# Altium PCB voting machine.PcbDoc
Units mil, origin at the board's own origin, x right, y up, seen from the top; angles counter-clockwise.
Board outline 2645.7 x 2252 mil, 4 copper layers (Top Layer, Layer 1, Layer 2, Bottom Layer), stack 23.756 mil thick; 23 components, 29 nets, 122 pads, 25 vias.
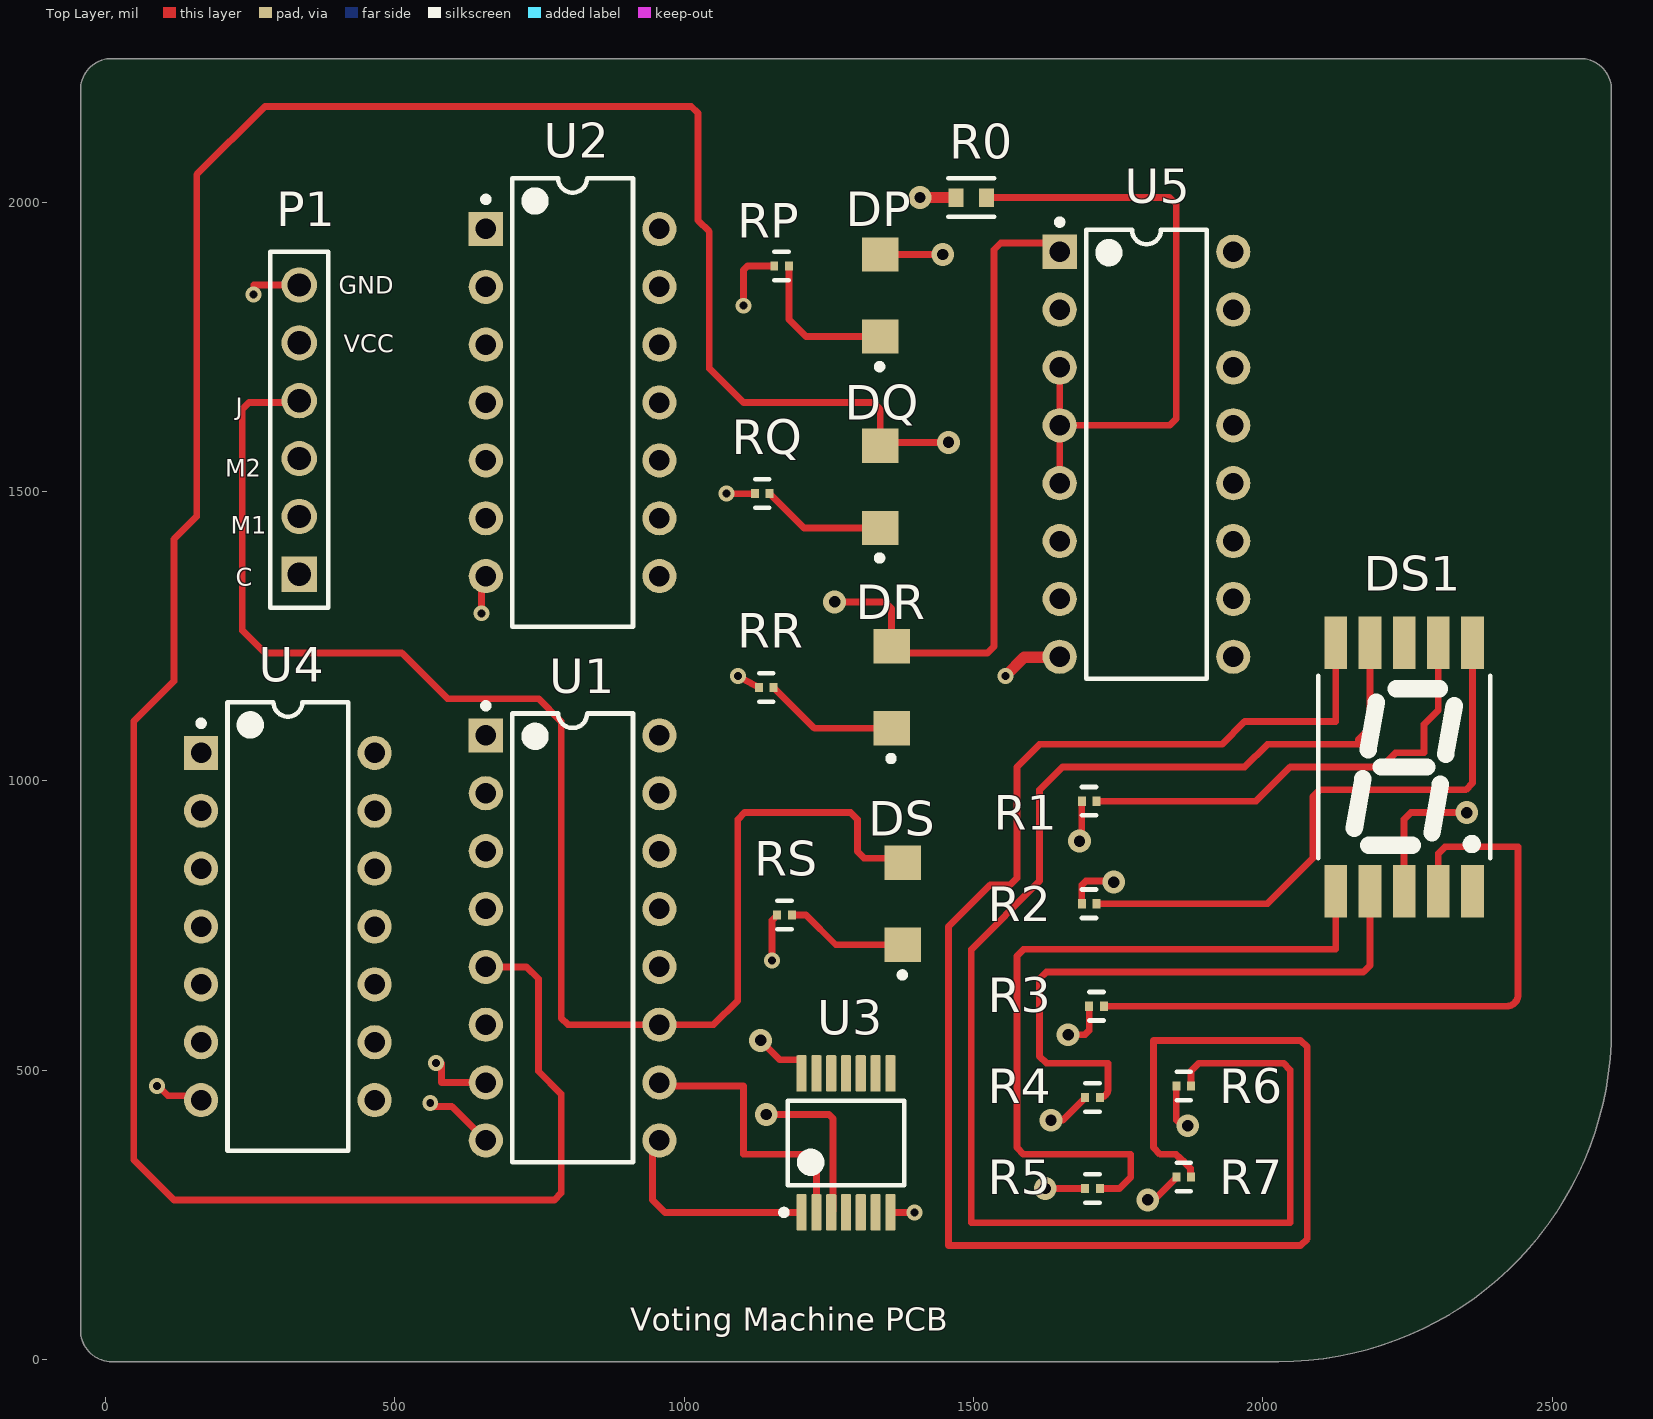
[diagram p0: Top Layer view]
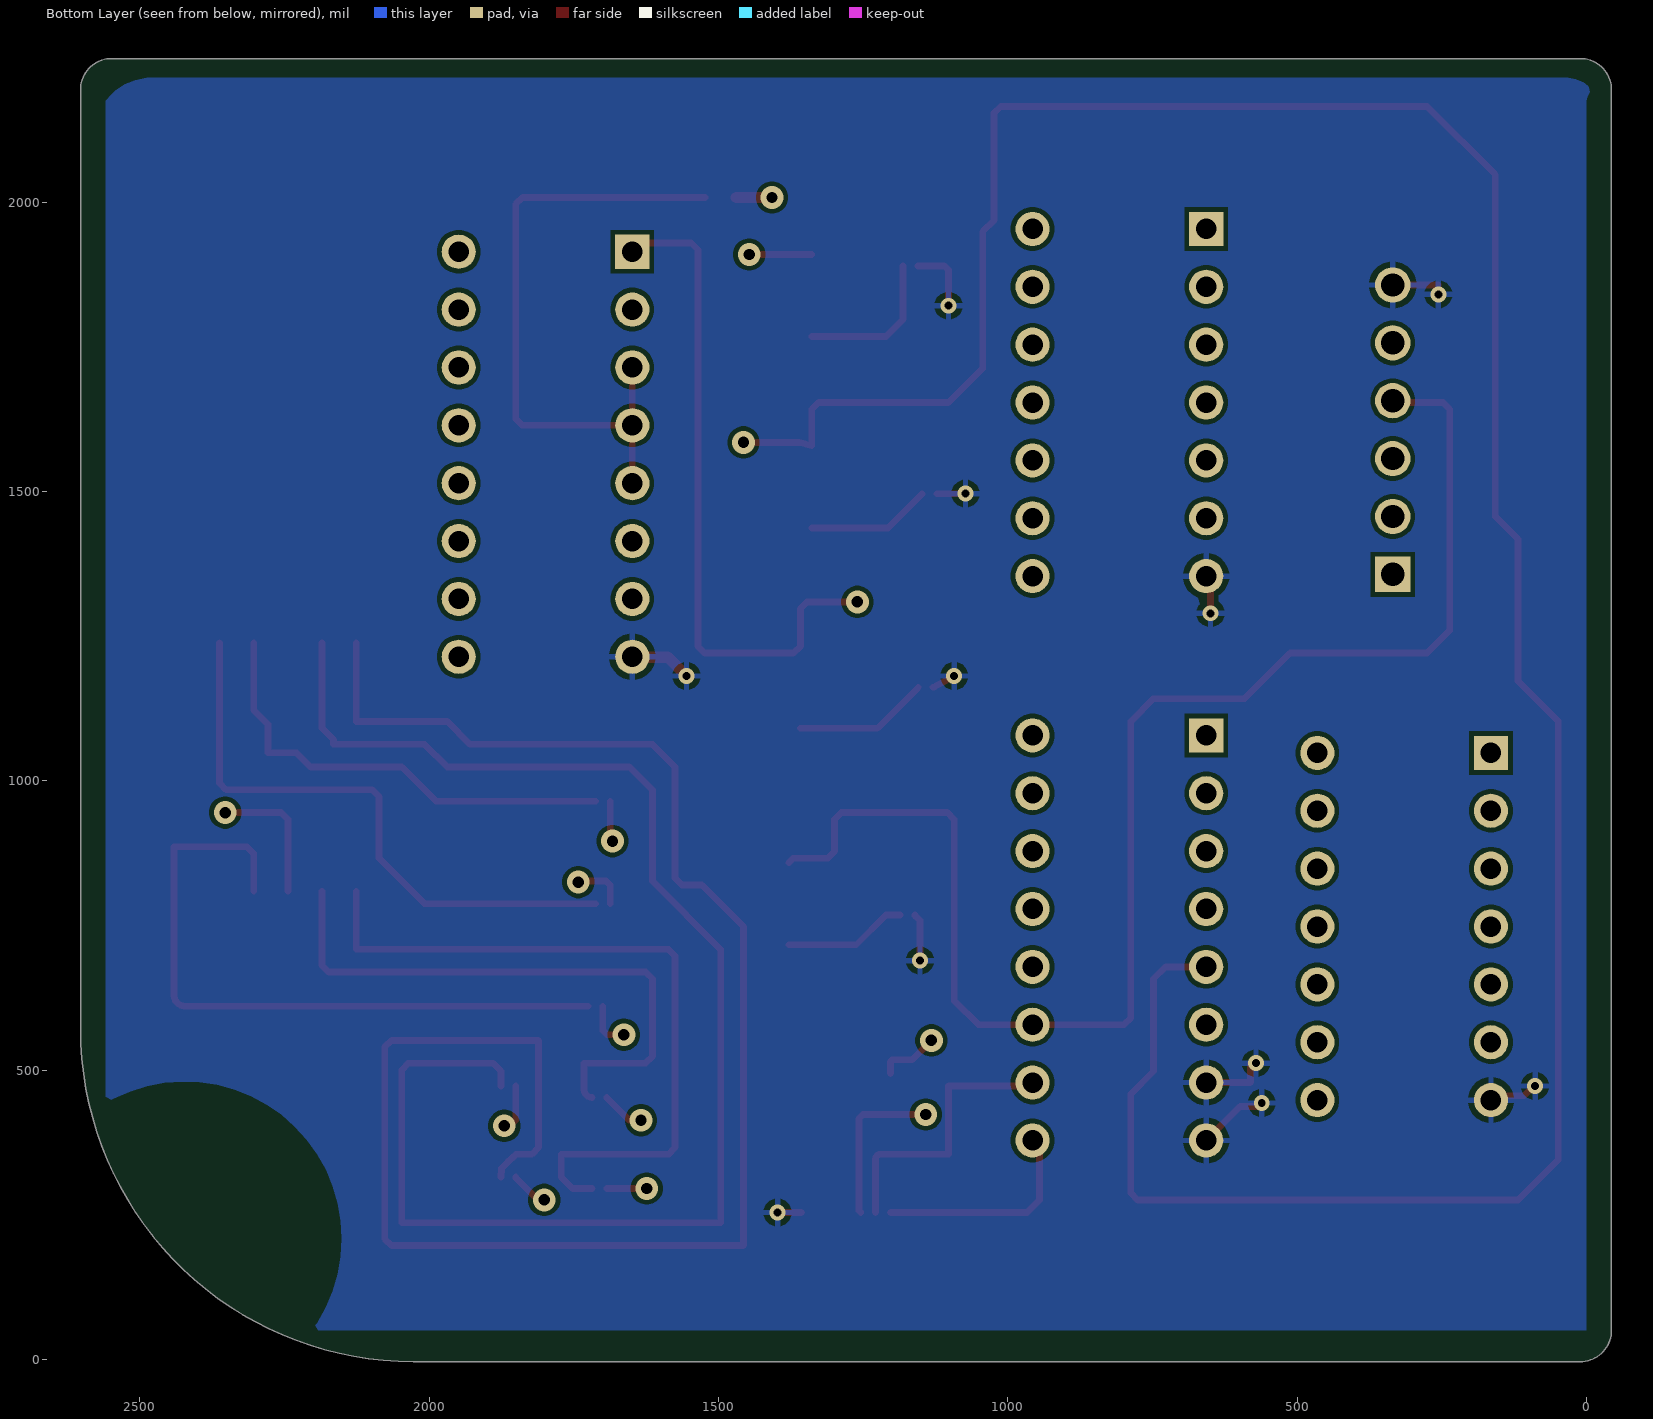
[diagram p1: Bottom Layer view, seen from below]
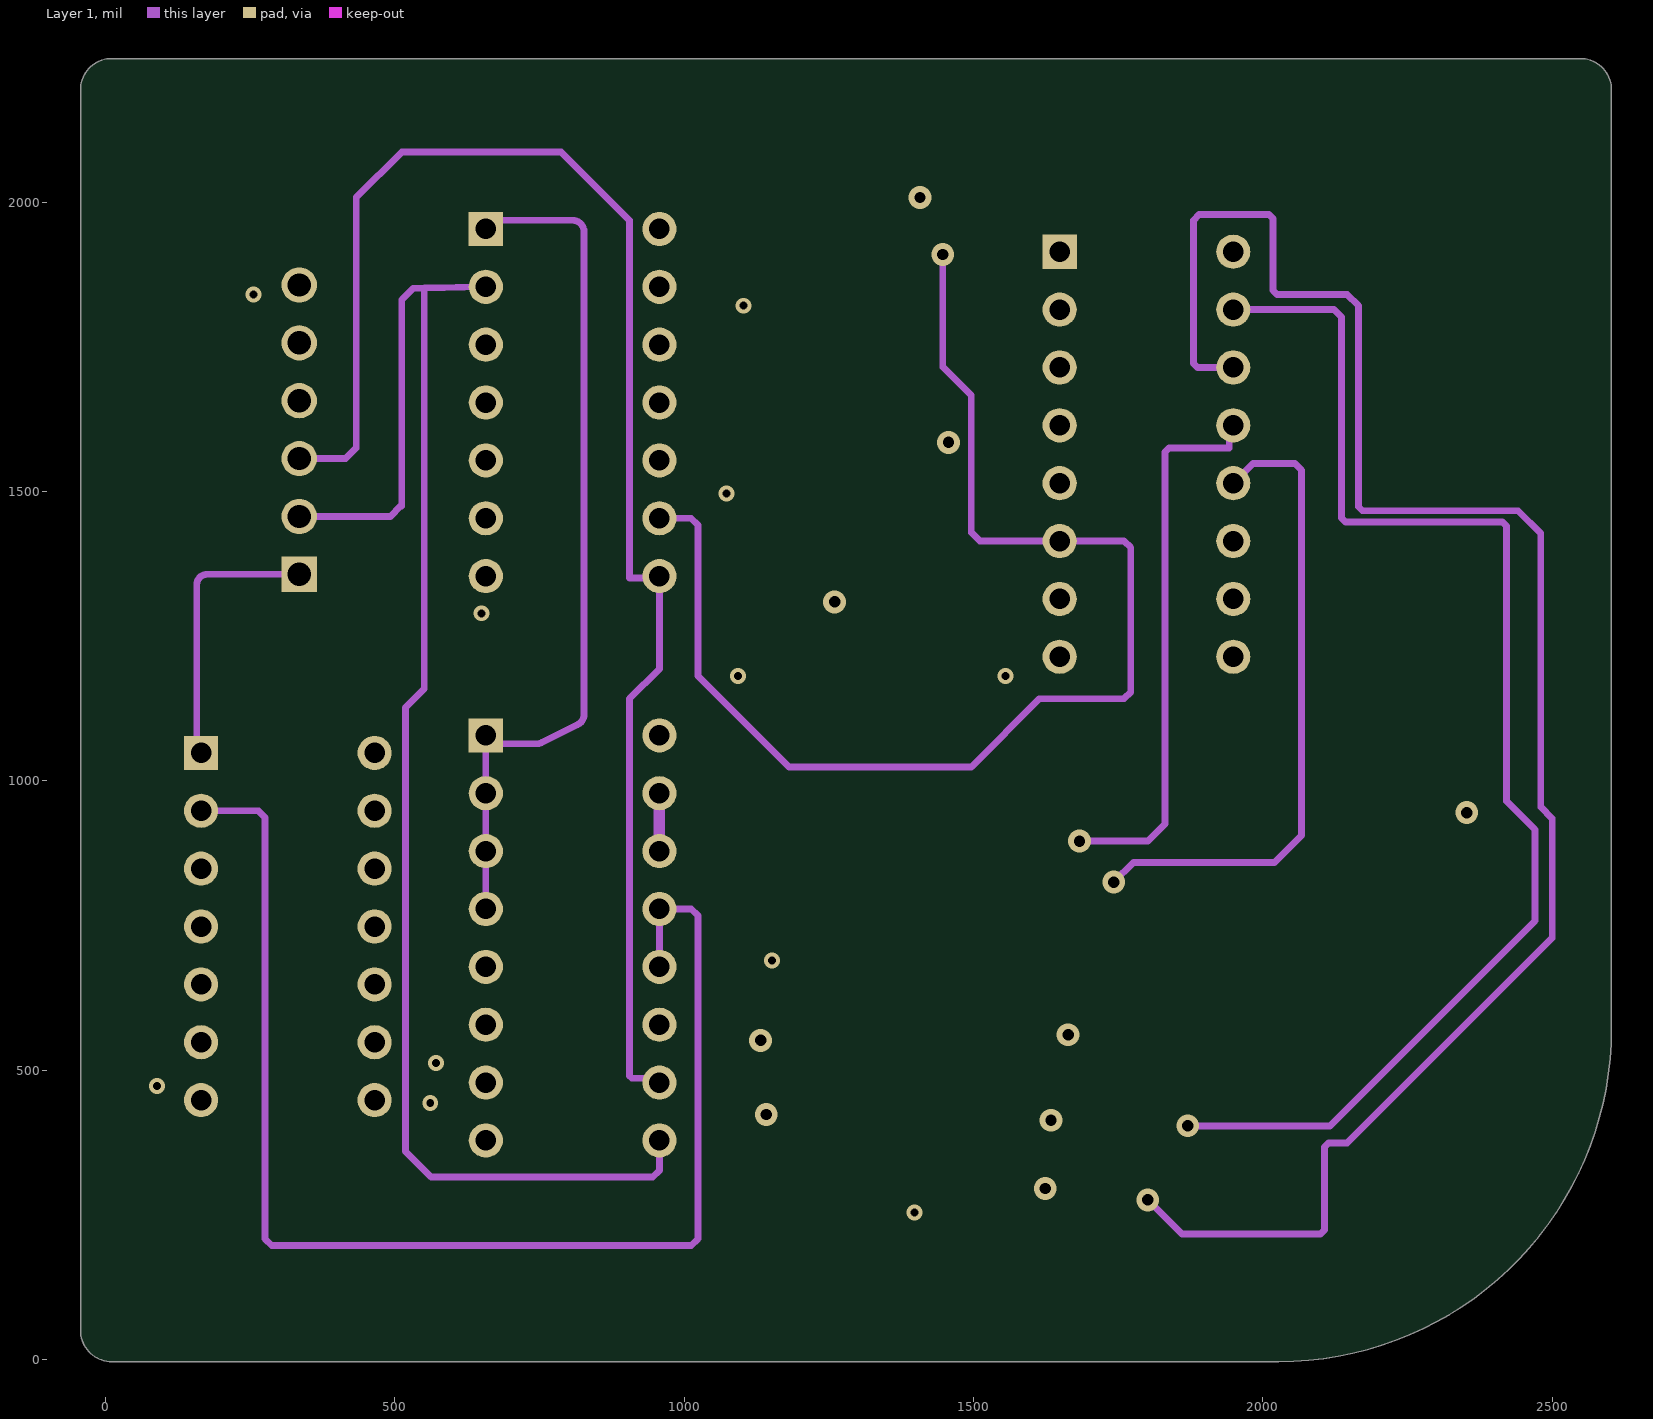
[diagram p2: Layer 1]
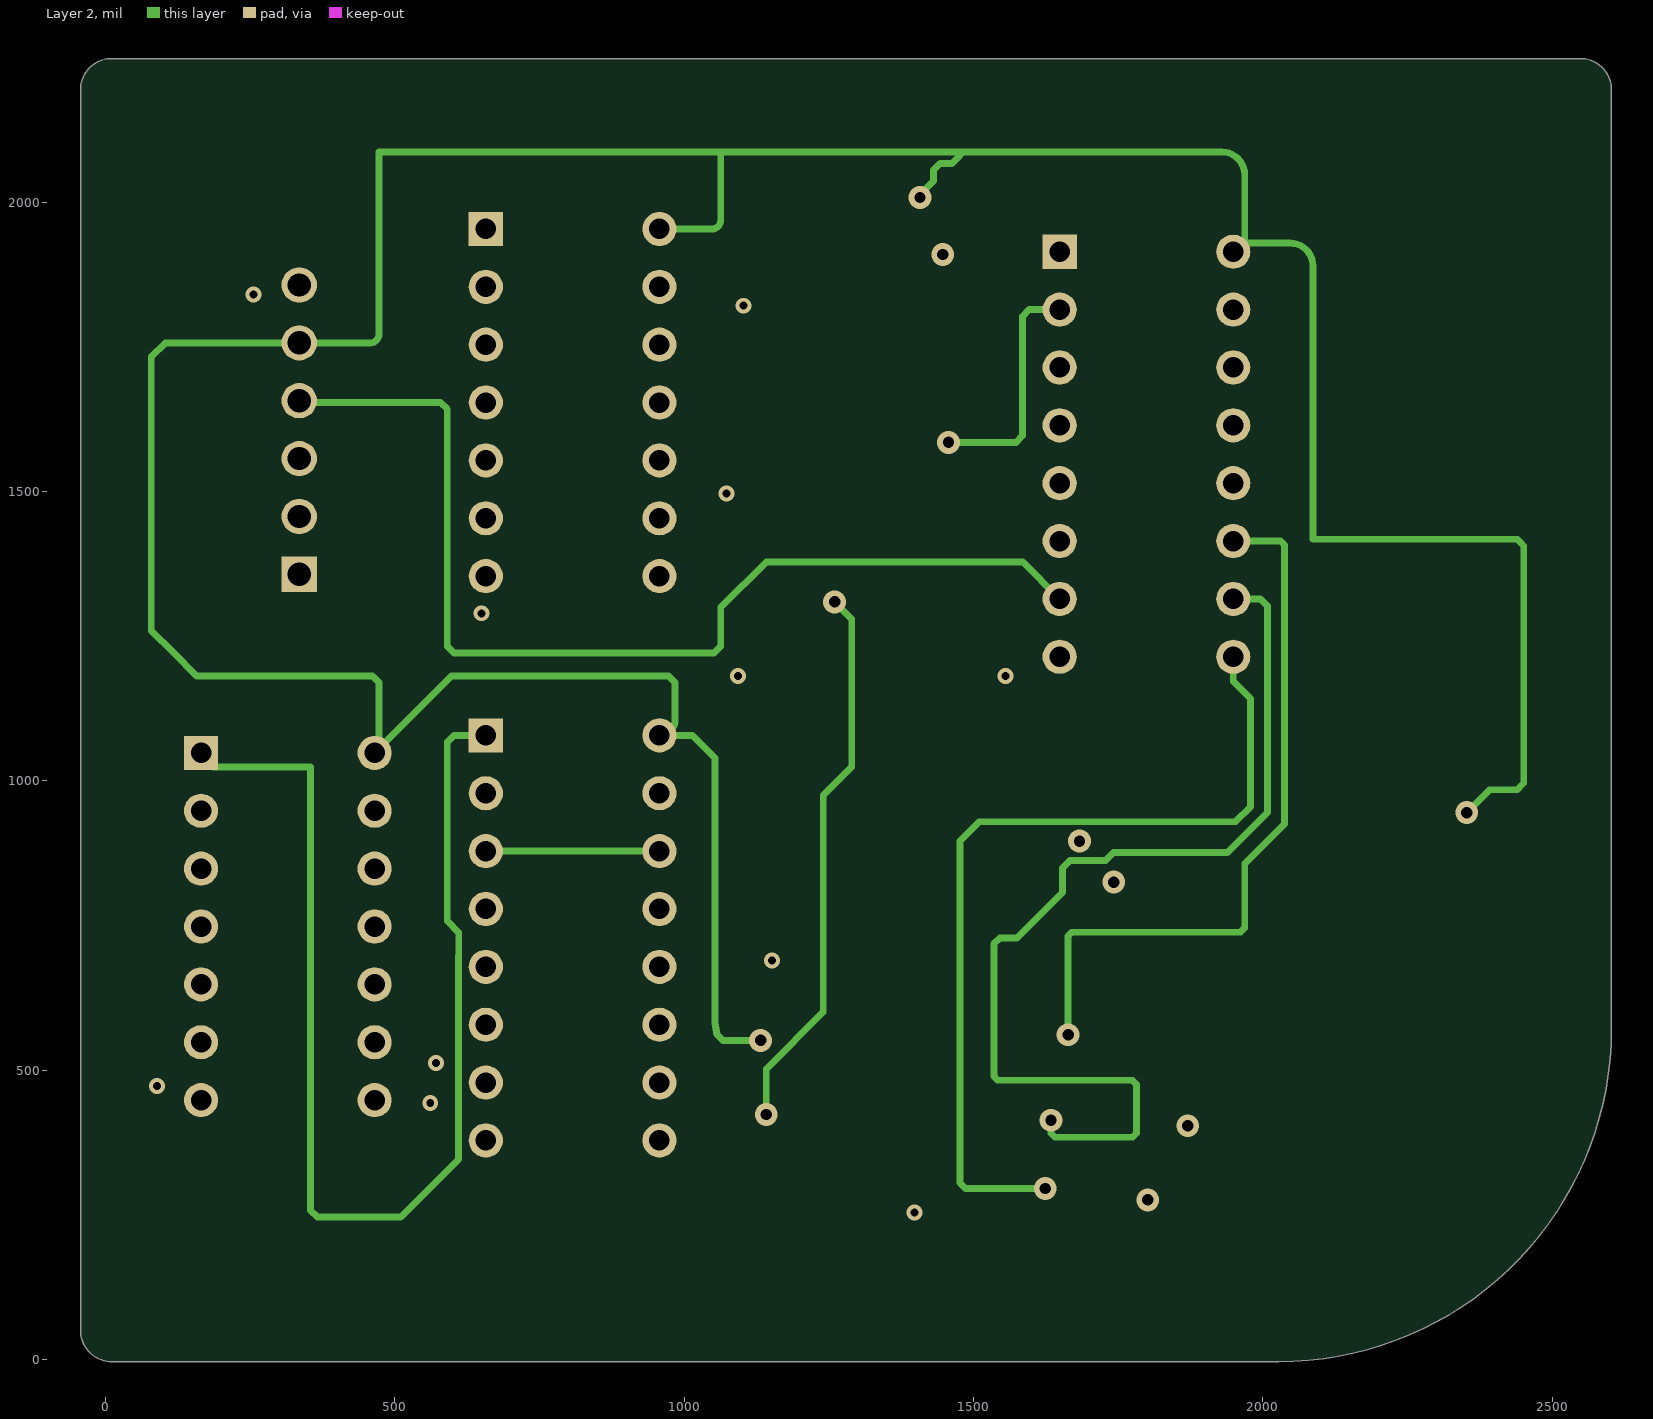
[diagram p3: Layer 2]
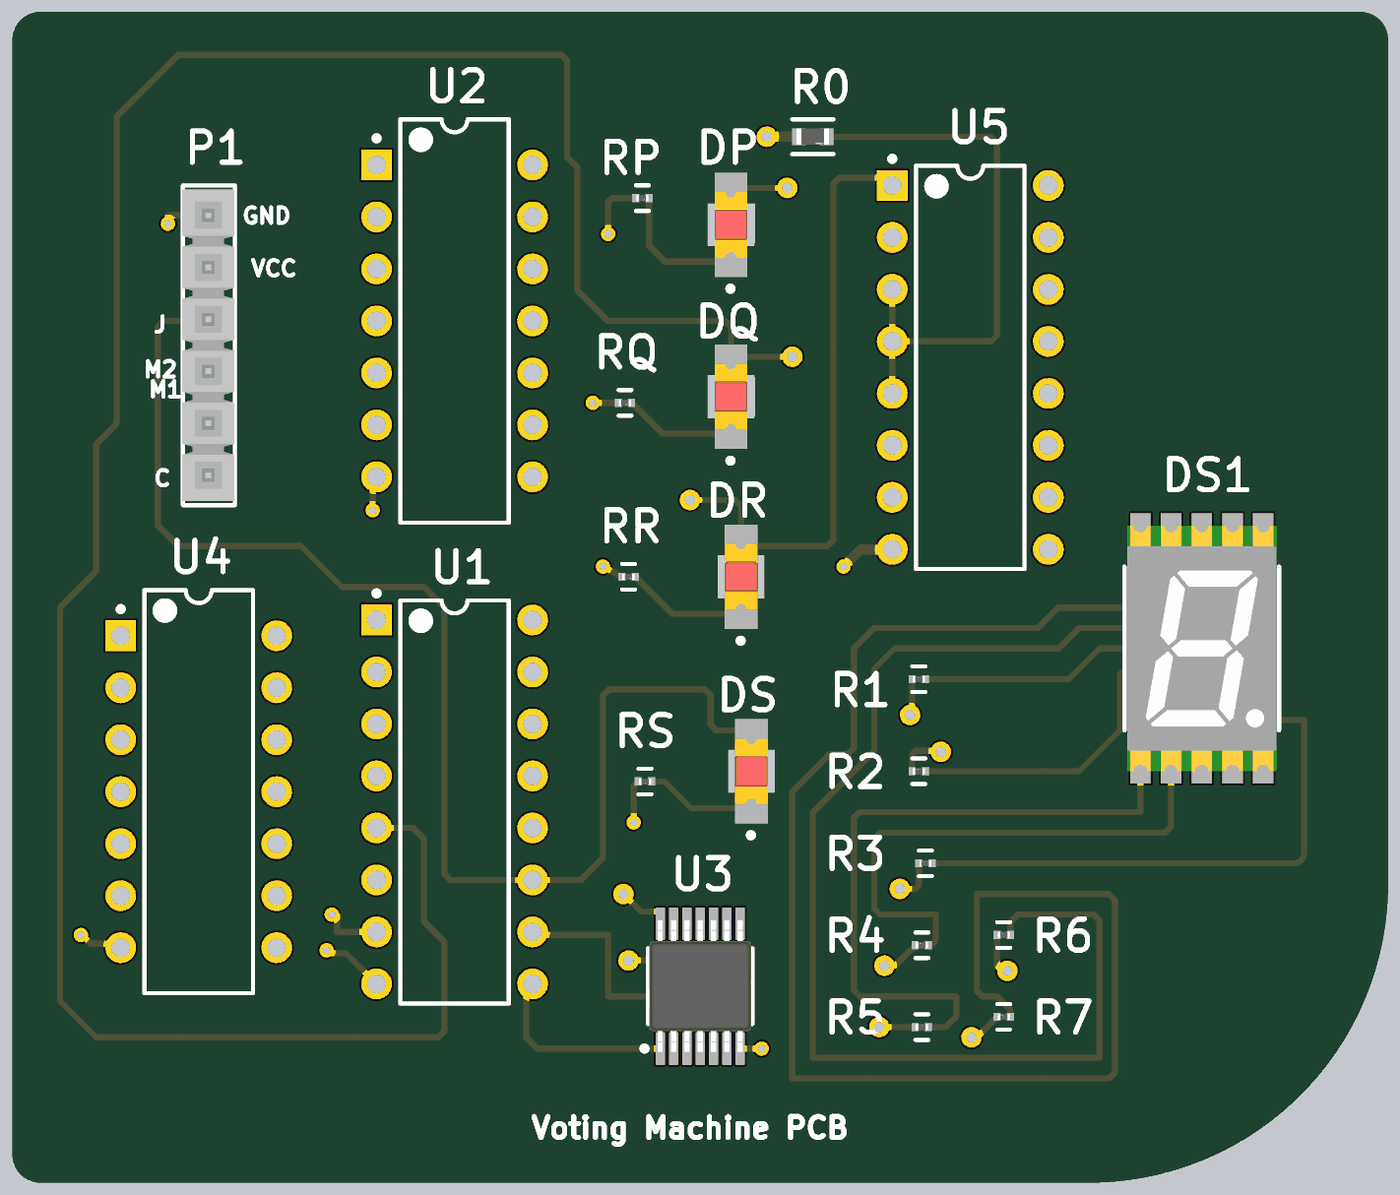
[diagram p4: 3D render of the assembled board from above, using the file's embedded part models]

## Layer stack, top to bottom
Top Solder: solder mask 0.4, Solder Resist, Dk 3.5
Top Layer: signal copper 1.4
Dielectric 2: prepreg 2.8, PP-006, Dk 4.1
Layer 1: signal copper 1.378
Dielectric 1: dielectric 12.6, FR-4, Dk 4.8
Layer 2: signal copper 1.378
Dielectric 3: prepreg 2.8, PP-006, Dk 4.1
Bottom Layer: signal copper 1.4
Bottom Solder: solder mask 0.4, Solder Resist, Dk 3.5

## Board outline
-43.32,50 -43.32,2194.09 cw(c10.63,2194.09) 10.63,2248.05 2548.43,2248.05 cw(c2548.43,2194.09) 2602.38,2194.09 2602.38,570.87 cw(c2027.56,570.87) 2027.56,-3.95 10.63,-3.95 cw(c10.63,50)

## Design rules (kind name [scope] priority, off if disabled: settings)
Clearance 5V_Clearance [All] p1: gap=7.87 ignorepadtopadclearanceinfootprint=FALSE
Clearance Clearance_1 [All] p2: gap=9.84 ignorepadtopadclearanceinfootprint=FALSE
PolygonConnect [All] p1: connectstyle=Relief reliefconductorwidth=10 reliefentries=4 polygonreliefangle="90 Angle" airgapwidth=10
RoutingVias RoutingVias_1A [All] p1: holewidth=19.68 width=39.37 viastyle="Through Hole" minholewidth=9.84 minwidth=19.68 maxholewidth=59.06 maxwidth=78.74
RoutingVias RoutingVias_1 [All] p2: holewidth=28 width=50 viastyle="Through Hole" minholewidth=28 minwidth=50 maxholewidth=28 maxwidth=50
SolderMaskExpansion [All] p1: expansion=4 istentingtop=FALSE
SupplyNets "Schematic Supply Nets_1" [InNet('GND')] p1: voltage=0.000
SupplyNets "Schematic Supply Nets" [InNet('+5')] p2: voltage=0.000
Width Width_1A [All] p1: maxlimit=39.37 minlimit=9.84 preferedwidth=19.68
Width Width_1 [All] p2: maxlimit=10 minlimit=10 preferedwidth=10
30 further rules are at their usual default settings.

## Components (designator, comment, footprint, x,y, rotation, side; value= is the part's Value field where it differs from the comment)
DP "LTST-C230EKT" FP-LTST-C230EKT-MFG 1338.58,1838.58 r90 top
DQ "LTST-C230EKT" FP-LTST-C230EKT-MFG 1338.58,1507.87 r90 top
DR "LTST-C230EKT" FP-LTST-C230EKT-MFG 1358.27,1161.42 r90 top
DS "LTST-C230EKT" FP-LTST-C230EKT-MFG 1377.95,787.4 r90 top
DS1 "157112S12800" WL-S7DS_L12W7.3H3.75 2244.09,1023.62 r0 top
P1 "TSW-106-07-F-S" SMTC-TSW-106-07-X-S 334.65,1356.69 r90 top
R0 "AC0603FR-101KL" FP-AC0603-IPC_C 1496.06,2007.87 r0 top
R1 "AF0201FR-07330RL" FP-AF0201-MFG 1699.8,964.57 r180 top
R2 "AF0201FR-07330RL" FP-AF0201-MFG 1699.8,787.4 r180 top
R3 "AF0201FR-07330RL" FP-AF0201-MFG 1712.6,610.24 r180 top
R4 "AF0201FR-07330RL" FP-AF0201-MFG 1705.71,452.76 r180 top
R5 "AF0201FR-07330RL" FP-AF0201-MFG 1705.71,295.28 r180 top
R6 "AF0201FR-07330RL" FP-AF0201-MFG 1863.19,472.44 r180 top
R7 "AF0201FR-07330RL" FP-AF0201-MFG 1863.19,314.96 r180 top
RP "AF0201FR-07330RL" FP-AF0201-MFG 1168.31,1889.76 r0 top
RQ "AF0201FR-07330RL" FP-AF0201-MFG 1134.84,1496.06 r0 top
RR "AF0201FR-07330RL" FP-AF0201-MFG 1141.73,1161.42 r0 top
RS "AF0201FR-07330RL" FP-AF0201-MFG 1173.23,767.72 r0 top
U1 "SN74F151BN" N0016A 807.09,728.35 r0 top
U2 "CD4073BE" N0014A 807.09,1653.54 r0 top
U3 "CD4030BPWR" PW0014A_M 1279.53,374.02 r90 top
U4 "SN7404N" N0014A 314.96,748.03 r0 top
U5 "SN7447ANE4" TI-N16 1798.82,1564.17 r0 top

## Footprints (in the part's own frame and the unit in brackets; to place one, negate y for a bottom-side part, rotate by r counter-clockwise, add the part's x,y. Pads: shape width x height; smd on the part's side, far side on the other; paste and mask are expansions set on the pad)
FP-AC0603-IPC_C [mil]
  rect 25.93x31.97 smd paste+0 mask+0: 1(-26.64,0) 2(26.64,0)
  silkscreen extent -40,-33 40,33, body extent -44,-22 44,22, height 10
FP-AF0201-MFG [mm]
  rect 0.35x0.4 smd paste+0 mask+0: 1(-0.325,0) 2(0.325,0)
  silkscreen extent -0.32,-0.63 0.32,0.63, body extent -0.6,-0.3 0.6,0.3, height 0.25
FP-LTST-C230EKT-MFG [mm]
  rect 1.5x1.6 smd paste+0 mask+0: 1(-1.8,0) 2(1.8,0)
  silkscreen extent -3.25,-0.1 -3,0.15, body extent -2.65,-0.95 2.65,0.95, height 0.25
N0014A [mm] "DIP, 14-Leads, Body 19.7x6.6mm, Pitch 2.54mm"
  rect 1.5x1.5 hole 0.9: 1(-3.81,7.62)
  round 1.5 hole 0.9: 2(-3.81,5.08) 3(-3.81,2.54) 4(-3.81,0) 5(-3.81,-2.54) 6(-3.81,-5.08) 7(-3.81,-7.62) 8(3.81,-7.62) 9(3.81,-5.08) 10(3.81,-2.54) 11(3.81,0) 12(3.81,2.54) 13(3.81,5.08) 14(3.81,7.62)
  silkscreen extent -3.93,-9.85 2.65,9.85, body extent -3.95,-9.85 3.95,9.85, height 5.08
N0016A [mm] "DIP, 16-Leads, Body 19.7x6.6mm, Pitch 2.54mm"
  rect 1.5x1.5 hole 0.9: 1(-3.81,8.89)
  round 1.5 hole 0.9: 2(-3.81,6.35) 3(-3.81,3.81) 4(-3.81,1.27) 5(-3.81,-1.27) 6(-3.81,-3.81) 7(-3.81,-6.35) 8(-3.81,-8.89) 9(3.81,-8.89) 10(3.81,-6.35) 11(3.81,-3.81) 12(3.81,-1.27) 13(3.81,1.27) 14(3.81,3.81) 15(3.81,6.35) 16(3.81,8.89)
  silkscreen extent -3.93,-9.85 2.65,10.31, body extent -3.95,-9.85 3.95,9.85, height 5.08
PW0014A_M [mm] "SOP, 14-Leads, Body 5.1x4.5mm, Pitch 0.65mm, IPC Low Density"
  rrect22% 1.6x0.45 smd: 1(-3.05,1.95) 2(-3.05,1.3) 3(-3.05,0.65) 4(-3.05,0) 5(-3.05,-0.65) 6(-3.05,-1.3) 7(-3.05,-1.95) 8(3.05,-1.95) 9(3.05,-1.3) 10(3.05,-0.65) 11(3.05,0) 12(3.05,0.65) 13(3.05,1.3) 14(3.05,1.95)
  silkscreen extent -3.17,-2.55 1.85,2.85, body extent -3.21,-2.5 3.21,2.5, height 1
SMTC-TSW-106-07-X-S [mm] ".025 SQ Post Terminal Strip Assembly, 1x6 Pins, Vertical, 2.54mm Pitch, Male"
  rect 1.55x1.55 hole 1.02: 1(0,0)
  round 1.55 hole 1.02: 2(2.54,0) 3(5.08,0) 4(7.62,0) 5(10.16,0) 6(12.7,0)
  silkscreen extent -1.46,-1.27 14.16,1.27, body extent -1.27,-1.24 13.97,1.3, height 8.38
TI-N16 [mm] "DIP, 16-Leads, Body 19.305x6.35 mm, Pitch 2.54 mm"
  rect 1.5x1.5 hole 0.9: 1(-3.81,8.89)
  round 1.5 hole 0.9: 2(-3.81,6.35) 3(-3.81,3.81) 4(-3.81,1.27) 5(-3.81,-1.27) 6(-3.81,-3.81) 7(-3.81,-6.35) 8(-3.81,-8.89) 9(3.81,-8.89) 10(3.81,-6.35) 11(3.81,-3.81) 12(3.81,-1.27) 13(3.81,1.27) 14(3.81,3.81) 15(3.81,6.35) 16(3.81,8.89)
  silkscreen extent -3.93,-9.85 2.65,10.31, body extent -3.95,-9.85 3.95,9.85, height 5.08
WL-S7DS_L12W7.3H3.75 [mm] "7 Segments Display SMT Single Digit, body 12x7.3mm"
  rect 1x2.3 smd: 1(-3,-5.45) 2(-1.5,-5.45) 3(0,-5.45) 4(1.5,-5.45) 5(3,-5.45) 6(3,5.45) 7(1.5,5.45) 8(0,5.45) 9(-1.5,5.45) 10(-3,5.45)
  silkscreen extent -3.77,-4 3.77,4, body extent -3.65,-6 3.65,6, height 3.85

## Part data
DP DQ DR DS: library part CMP-22017-000030-1, "LED RED CLEAR CHIP SMD", Case Code (Imperial)=1206, Case Code (Metric)=3216, Color=Red, Forward Current=30mA, Forward Voltage=2V, Lens Color=Colorless, Max Operating Temperature=85°C, Min Operating Temperature=-55°C, Package Quantity=1, Power Dissipation=100mW, Reverse Voltage=5V, Test Current=10mA, Case/Package=1206, Depth=1.6mm, Dominant Wavelength=621nm, Height=1.1mm, Illumination Color=Red, Lead Free="Lead Free", Length=3.2mm, Lens Style=Diffused, Lens Transparency=Clear, Luminous Intensity=6mcd, Mount="Surface Mount", Number of Elements=1, Number of LEDs=1, Number of Pins=2, Packaging="Tape and Reel", Power Rating=100mW, Radiation Hardening=No, Viewing Angle=130°, Wavelength=630nm, Width=1.6mm
DS1: library part CMP-03913-119893987-3, "7-Seg Display, Comm Anode, Super Red Rohs Compliant: Yes", Forward Current=100mA, Forward Voltage=2V, Max Operating Temperature=85°C, Max Reverse Voltage (DC)=5V, Min Operating Temperature=-35°C, Dominant Wavelength=635nm, Height=3.75mm, Length=12mm, Luminous Intensity=15mcd, RoHS=Compliant, Width=7.3mm
P1: library part CMP-1024-00385-1, "0.025\" SQ Post Header, Through-hole, Vertical, -55 to 125 degC, 2.54 mm Pitch, 6-Pin, Male, RoHS", Manufacturer=Samtec, Temperature Range="-55 to 125 degC", ComponentLink1Description="Manufacturer URL", ComponentLink1URL=http://www.samtec.com, ComponentLink2Description=Datasheet, ComponentLink2URL=http://www.samtec.com/documents/webfiles/pdf/TSW_TH.PDF, ComponentLink3Description="Package Specification", ComponentLink3URL=http://www.samtec.com/documents/webfiles/cpdf/TSW-XXX-XX-XXX-X-XX-XXX-MKT.pdf, DatasheetVersion=F-214, Mounting Technology=Through-hole, Orientation=Vertical, PackageDescription=".025[0.64] SQ. Post Terminal Strip Assembly", PackageReference=TSW-106-07-X-S, PackageVersion="DM, 8/1988", PartNumber=TSW-106-07-F-S, Pitch="2.54 mm", RoHS=True
R0: library part CMP-03412-045511-1, "RES 1kΩ 1.00% 0.1W 0603", Case Code (Imperial)=0603, Case Code (Metric)=1608, Max Operating Temperature=155°C, Min Operating Temperature=-55°C, Power Rating=100mW, Resistance=1kR, Temperature Coefficient=100ppm/°C, Tolerance=1%, Voltage Rating=50V, Case/Package=0603, Height=0.45mm, Length=1.6mm, Packaging="Tape and Reel", RoHS Compliant=Yes, Series=AC, Termination=SMD/SMT, Width=0.8mm
R1 R2 R3 R4 R5 R6 R7 RP RQ RR RS: library part CMP-03412-043091-1, "Anti-Sulfurated Chip Resistors Automotive Grade 330Ω 1% 200ppm/°C 0201", Case/Package=0201, Max Operating Temperature=125°C, Max Power Dissipation=50mW, Min Operating Temperature=-55°C, Resistance=330R, Resistor Type="Thick Film", Temperature Coefficient=200ppm/°C, Tolerance=1%, Features="Moisture Resistant", Height=0.01inch, Length=0.024inch, Number of Terminations=2, Packaging="Tape and Reel", RoHS Compliant=Yes, Series=AF, Width=0.012inch
U1: library part CMP-1633-00607-2, "8-Line To 1-Line Data Selector/Multiplexer, N0016A, TUBE", F @ Nom Voltage(Max)(Mhz)=70, Generic Part Number=SN74F151B, ICC @ Nom Voltage(Max)(mA)=21, Manufacturer="Texas Instruments", Operating Temperature Range(C)="0 to 70", Rating=Catalog, tpd @ Nom Voltage(Max)(ns)=9.5, Voltage(Nom)(V)=5, Channels(#)=1, Code_JEDEC=MS-001, Configuration=8：1, DatasheetVersion=SDFS023A, Function=Encoder/Multiplexer, Output Drive (IOL/IOH)(Max)(mA)=24/-1, PackageReference=N0016A, Schmitt Trigger=No, Technology Family=F, Type=Standard, VCC(Max)(V)=5.5, VCC(Min)(V)=4.5
U2: library part CMP-0777-00285-3, "CMOS Triple 3-Input AND Gate, N0014A, TUBE", F @ Nom Voltage(Max)(Mhz)=8, Generic Part Number=CD4073B, ICC @ Nom Voltage(Max)(mA)=0.025, Manufacturer="Texas Instruments", Operating Temperature Range(C)="-55 to 125", Rating=Catalog, tpd @ Nom Voltage(Max)(ns)=120, Voltage(Nom)(V)=10, Bits(#)=3, DatasheetVersion=SCHS057C, Input Type=CMOS, Output Type=CMOS, PackageReference=N0014A, Schmitt Trigger=No, Technology Family=CD4000, VCC(Max)(V)=18, VCC(Min)(V)=3
U3: library part CMP-0778-00137-3, "CMOS Quad Exclusive-OR Gate, PW0014A, LARGE T&R", F @ Nom Voltage(Max)(Mhz)=8, Generic Part Number=CD4030B, ICC @ Nom Voltage(Max)(mA)=0.015, Manufacturer="Texas Instruments", Operating Temperature Range(C)="-55 to 125", Rating=Military, tpd @ Nom Voltage(Max)(ns)=130, Voltage(Nom)(V)=10, Bits(#)=4, DatasheetVersion=SCHS035C, Input Type=CMOS, Output Drive (IOL/IOH)(Max)(mA)=1.5/-1.5, Output Type=CMOS, PackageReference=PW0014A, Schmitt Trigger=No, Technology Family=CD4000, VCC(Max)(V)=18, VCC(Min)(V)=3
U4: library part CMP-1615-00872-2, "Hex inverters, N0014A, TUBE", F @ Nom Voltage(Max)(Mhz)=35, Generic Part Number=SN7404, ICC @ Nom Voltage(Max)(mA)=0.033, Manufacturer="Texas Instruments", Operating Temperature Range(C)="0 to 70", Rating=Catalog, tpd @ Nom Voltage(Max)(ns)=22, Voltage(Nom)(V)=5, Bits(#)=6, Code_JEDEC=MS-001, DatasheetVersion=SDLS029C, Input Type=TTL, Output Drive (IOL/IOH)(Max)(mA)=-0.4/16, Output Type=CMOS, PackageReference=N0014A, Schmitt Trigger=No, Technology Family=TTL, VCC(Max)(V)=5.25, VCC(Min)(V)=4.75
U5: library part CMP-0388-00311-1, "BCD-to-7-Segment Decoder / Driver, 4.75 to 5.25 V, 0 to 70 degC, 16-pin DIP (N16), Pb-Free (RoHS)", Manufacturer="Texas Instruments", Code_JEDEC=MS-001, ComponentLink1Description="Manufacturer URL", ComponentLink1URL=http://www.ti.com/, ComponentLink2Description=Datasheet, ComponentLink2URL=http://www.ti.com/general/docs/lit/getliterature.tsp?genericPartNumber=SN7447A&fileType=pdf, ComponentLink3Description="Package Specification", ComponentLink3URL=http://www.ti.com/litv/pdf/mpdi002c, DatasheetVersion=SDLS111, Eco-Plan="Pb-Free (RoHS)", Mounting Technology="Through Hole", PackageDescription="16-Pin Plastic In-Line, Body 19.305 x 6.35 mm, Pitch 2.54 mm", PackageReference=N16, PackageVersion=4040049/E, PartNumber=SN7447ANE4, SubFamily="Discrete Segment LED Driver", Vin(Max)(V)=5.25, Vin(Min)(V)=4.75

## Via types
v1: diameter 39.37, hole 19.68, Top Layer to Bottom Layer, 14 vias
v2: diameter 27.56, hole 13.78, Top Layer to Bottom Layer, 11 vias

## Nets (pads, with @x,y where several pads share a name; then routed paths per layer and width w, separated by ;. In a path a pad name is that pad's centre, name@x,y a point inside that pad or via, vN(x,y) a via of type N, cw(c..) or ccw(c..) an arc to the next point about the centre after c; other vN are vias at no path point)
+5: DS1.3 P1.5 R0.1 U1.16 U2.14 U3.14 U4.14 U5.16 | length 7032.7
  Top Layer w11.81: v1(1131.89,551.18) 1165.33,517.74 1199.8,517.74 1202.76,514.78 U3.14 ; DS1.3 2244.09,933.35 2255.63,944.88 v1(2352.36,944.88)
  Top Layer w19.68: v1(1407.48,2007.87) R0.1
  Layer 2 w11.81: U4.14 U4.14@472.44,1055.51 ; U2.14 1048.03,1953.54 ccw(c1048.03,1968.5) 1062.99,1968.5 1062.99,2086.61 ; v1(1131.89,551.18) 1066.71,551.18 1056.55,561.34 1053.17,580.58 1053.02,1039.4 1047.26,1045.16 1014.07,1078.35 U1.16 ccw(c957.09,1105.51) 984.25,1105.51 984.25,1169.57 972.72,1181.1 598.03,1181.1 U4.14@472.44,1055.51 ; v1(1407.48,2007.87) 1407.48,2013.2 1430.8,2036.52 1430.8,2055.4 1442.33,2066.93 1462.46,2066.93 1476.38,2080.85 1476.38,2086.61 ; U5.16 ccw(c1948.82,1933.86) 1967.96,1929.26 ccw(c1948.82,1933.86) 1968.5,1933.86 1968.5,2047.24 ccw(c1929.13,2047.24) 1929.13,2086.61 1476.38,2086.61 ; U5.16@1968.5,1929.13 2047.24,1929.13 cw(c2047.24,1889.76) 2086.61,1889.76 2086.61,1417.32 2439.26,1417.32 2445.02,1411.56 2450.79,1405.79 2450.79,995.78 2439.26,984.25 2391.73,984.25 v1(2352.36,944.88) ; U4.14@472.44,1055.51 472.44,1169.57 460.91,1181.1 157.48,1181.1 118.11,1220.47 78.74,1259.84 78.74,1732.28 103.15,1756.69 P1.5 457.48,1756.69 ccw(c457.48,1771.65) 472.44,1771.65 472.44,2086.61 1062.99,2086.61 ; 1062.99,2086.61 1476.38,2086.61
GND: P1.6 RP.1 RQ.1 RR.1 RS.1 U1.7 U1.8 U2.7 U3.7 U4.7 U5.8 | length 937.8
  Top Layer w11.81: v2(88.58,472.44) 90.71,472.44 107.59,455.56 157.43,455.56 U4.7 ; v2(255.91,1840.55) 255.91,1856.69 P1.6 ; v2(561.02,442.91) 566.82,437.11 598.32,437.11 U1.8 ; v2(570.87,511.81) 580.71,511.81 580.71,478.35 U1.7 ; v2(649.61,1289.37) 649.61,1353.54 U2.7 ; v2(1072.83,1496.06) RQ.1 ; v2(1092.52,1181.1) RR.1 ; v2(1102.36,1820.87) 1102.36,1882.84 1109.28,1889.76 RP.1 ; v2(1151.57,688.98) 1151.57,758.83 1158.49,765.75 1159.45,765.75 1160.43,766.73 RS.1 ; U3.7 v2(1397.64,253.94)
  Top Layer w19.68: v2(1397.64,253.94) v2@1397.64,255.91 ; v2(1555.12,1181.1) 1587.63,1213.62 1648.26,1213.62 U5.8
NetDP_1: DP.1 RP.2 | length 262.2
  Top Layer w11.81: RP.2 1181.1,1797.24 1210.63,1767.72 DP.1
NetDP_2: DP.2 U2.9 U5.6 | length 2344.3
  Top Layer w11.81: DP.2 v1(1446.85,1909.45)
  Layer 1 w11.81: U2.9 1012.09,1453.54 1023.62,1442.01 1023.62,1181.1 1181.1,1023.62 1496.06,1023.62 1614.17,1141.73 1760.12,1141.73 1771.65,1153.26 1771.65,1402.64 1760.12,1414.17 U5.6 1510.74,1414.17 1496.06,1428.85 1496.06,1665.64 1446.85,1714.86 v1(1446.85,1909.45)
NetDQ_1: DQ.1 RQ.2 | length 215.4
  Top Layer w11.81: RQ.2 1206.69,1437.01 DQ.1
NetDQ_2: DQ.2 U1.5 U5.2 | length 5290.1
  Top Layer w11.81: U1.5 727.45,678.35 748.03,657.76 748.03,497.89 787.4,458.52 787.4,287.12 775.87,275.59 118.11,275.59 48.52,345.18 48.52,1102.36 118.11,1171.95 118.11,1417.32 157.48,1456.69 157.48,2047.24 275.59,2165.35 1012.09,2165.35 1023.62,2153.82 1023.62,1968.5 1043.31,1948.82 1043.31,1712.6 1102.36,1653.54 1327.05,1653.54 1338.58,1642.01 DQ.2 1360.24,1584.65 v1(1456.69,1584.65)
  Layer 2 w11.81: v1(1456.69,1584.65) 1573.11,1584.65 1584.65,1596.18 1584.65,1802.64 1596.18,1814.17 U5.2
NetDR_1: DR.1 RR.2 | length 233.1
  Top Layer w11.81: RR.2 1225.39,1090.55 DR.1
NetDR_2: DR.2 U3.3 U5.1 | length 2406.1
  Top Layer w11.81: v1(1141.73,423.23) 1249.97,423.23 1256.89,416.31 1256.89,256.89 U3.3 ; v1(1259.84,1309.06) 1346.74,1309.06 1358.27,1297.52 DR.2 1370.08,1220.47 1523.9,1220.47 1535.43,1232 1535.43,1917.6 1546.96,1929.13 1633.86,1929.13 U5.1
  Layer 2 w11.81: v1(1141.73,423.23) 1141.73,501.97 1240.16,600.39 1240.16,974.41 1289.37,1023.62 1289.37,1279.53 v1(1259.84,1309.06)
NetDS1_1: DS1.1 R5.1 | length 1289.9
  Top Layer w11.81: R5.1 1751.97,295.28 1771.65,314.96 1771.65,354.33 1586.33,354.33 1574.8,365.86 1574.8,697.13 1586.33,708.66 2125.98,708.66 DS1.1
NetDS1_2: DS1.2 R4.1 | length 1032.9
  Top Layer w11.81: R4.1 ccw(c1718.5,466.54) 1732.28,466.54 1732.28,511.81 1625.7,511.81 1614.17,523.34 1614.17,657.76 1625.7,669.29 2173.51,669.29 2185.04,680.82 DS1.2
NetDS1_4: DS1.4 R3.1 | length 1190.5
  Top Layer w11.81: R3.1 2421.26,610.24 ccw(c2421.26,629.92) 2440.94,629.92 2440.94,885.83 2357.62,885.82 2314.68,885.82 2303.15,874.29 DS1.4
NetDS1_6: DS1.6 R2.1 | length 1040.8
  Top Layer w11.81: R2.1 2007.87,787.4 2086.61,866.14 2086.61,972.72 2098.15,984.25 2350.67,984.25 2362.2,995.78 DS1.6
NetDS1_7: DS1.7 R1.1 | length 800.8
  Top Layer w11.81: R1.1 1988.19,964.57 2047.24,1023.62 2204.72,1023.62 2229.33,1048.23 2278.54,1048.23 2278.54,1097.44 2303.15,1122.05 DS1.7
NetDS1_9: DS1.9 R6.1 | length 2586.7
  Top Layer w11.81: R6.1 1875.98,498.03 1889.76,511.81 2035.71,511.81 2047.24,500.28 2047.24,236.22 1496.06,236.22 1496.06,708.66 1614.17,826.77 1614.17,984.25 1653.54,1023.62 1968.5,1023.62 2007.87,1062.99 2165.35,1062.99 2165.35,1071.15 2185.04,1090.83 DS1.9
NetDS1_10: DS1.10 R7.1 | length 3121.3
  Top Layer w11.81: R7.1 1875,330.17 1864.62,340.55 1849.88,354.33 1822.55,354.33 1811.02,365.86 1811.02,551.18 2065.24,551.18 2076.77,539.65 2076.77,208.38 2065.24,196.85 1456.69,196.85 1456.69,748.03 1528.68,820.02 1563.27,820.02 1574.8,831.55 1574.8,1023.62 1614.17,1062.99 1929.13,1062.99 1968.5,1102.36 2125.98,1102.36 DS1.10
NetDS_1: DS.1 RS.2 | length 213.1
  Top Layer w11.81: RS.2 1210.63,767.72 1261.81,716.54 DS.1
NetDS_2: DS.2 P1.4 U1.11 U5.7 | length 4480.8
  Top Layer w11.81: P1.4 331.5,1653.54 247.75,1653.54 236.22,1642.01 236.22,1259.84 275.59,1220.47 511.81,1220.47 590.55,1141.73 748.03,1141.73 787.4,1102.36 787.4,589.88 798.93,578.35 U1.11 1050.79,578.35 1092.52,620.08 1092.52,933.35 1104.05,944.88 1287.68,944.88 1299.21,933.35 1299.21,877.67 1310.74,866.14 1370.08,866.14 DS.2
  Layer 2 w11.81: P1.4 337.8,1653.54 579.02,1653.54 590.55,1642.01 590.55,1232 602.08,1220.47 1051.46,1220.47 1062.99,1232 1062.99,1299.21 1141.73,1377.95 1585.04,1377.95 U5.7
NetP1_1: P1.1 U1.1 U1.2 U1.3 U1.4 U1.14 U1.15 U2.1 U4.1 | length 4455.5
  Layer 1 w11.81: U4.1@157.48,1055.51 157.48,1338.58 cw(c175.59,1338.58) 175.59,1356.69 P1.1 ; U1.4 U1.3 U1.2 U1.1 676.77,1063.79 744.97,1063.79 ccw(c744.97,1083.47) 753.73,1065.84 753.78,1065.87 815.89,1096.92 ccw(c807.09,1114.53) 826.77,1114.53 826.77,1948.82 ccw(c807.09,1948.82) 807.09,1968.5 676.77,1968.5 U2.1
  Layer 1 w19.68: U1.14 U1.15
  Layer 2 w11.81: U4.1 ccw(c189.37,1048.03) 189.37,1023.62 354.33,1023.62 354.33,257.59 365.86,246.06 510.12,246.06 609.84,345.78 609.84,697.92 610.24,698.31 610.24,737.85 590.55,757.53 590.55,1066.82 602.08,1078.35 U1.1 ; U1.3 U1.14
NetP1_2: P1.2 U1.9 U2.2 U3.1 | length 3086.7
  Top Layer w11.81: U1.9 ccw(c957.09,366.14) 944.88,366.14 944.88,275.59 966.54,253.94 U3.1
  Layer 1 w11.81: P1.2 492.13,1456.69 509.84,1474.41 ; 511.81,1474.41 511.81,1831.13 ; 513.19,1832.54 531.07,1850.81 551.18,1851.25 ; U2.2 551.18,1851.25 ; U1.9 957.09,326.49 945.56,314.96 562.71,314.96 518.31,359.37 518.31,1126.72 550.75,1159.16 550.75,1850.81 551.18,1851.25
NetP1_3: P1.3 U1.10 U2.8 U3.2 | length 3195.5
  Top Layer w11.81: U1.10 ccw(c962.99,478.35) 962.99,472.44 1102.36,472.44 1102.36,354.33 1220.47,354.33 cw(c1220.47,346.46) 1228.35,346.46 U3.2
  Layer 1 w11.81: P1.3 414.96,1556.69 433.07,1574.8 433.07,2007.87 511.81,2086.61 787.4,2086.61 905.51,1968.5 905.51,1350.11 953.66,1350.11 U2.8 957.09,1193.31 905.51,1141.73 905.51,489.88 909.51,485.88 949.55,485.88 U1.10
NetR0_2: R0.2 U5.3 U5.4 U5.5 | length 1109.5
  Top Layer w11.81: R0.2 1838.86,2007.87 1850.39,1996.34 1850.39,1625.7 1838.86,1614.17 U5.4 ; U5.5 U5.4 ; U5.3 U5.4
NetR1_2: R1.2 U5.13 | length 1029.4
  Top Layer w11.81: v1(1683.07,895.67) 1687.01,899.61 R1.2
  Layer 1 w11.81: v1(1683.07,895.67) 1801.18,895.67 1830.71,925.2 1830.71,1567.88 1837.63,1574.8 1941.9,1574.8 1941.9,1607.25 U5.13
NetR2_2: R2.2 U5.12 | length 1217.6
  Top Layer w11.81: R2.2 1687.01,819.85 1693.93,826.77 1740.16,826.77 v1(1742.13,824.8)
  Layer 1 w11.81: v1(1742.13,824.8) 1776.11,858.79 2020.2,858.79 2066.93,905.51 2066.93,1536.63 2055.4,1548.16 1982.8,1548.16 U5.12
NetR3_2: R3.2 U5.11 | length 1344.8
  Top Layer w11.81: v1(1663.39,561.02) 1692.88,561.02 1699.8,567.94 R3.2
  Layer 2 w11.81: v1(1663.39,561.02) 1663.39,731.27 1670.3,738.19 1961.59,738.19 1968.5,745.11 1968.5,856.3 2037.4,925.2 2037.4,1407.25 2030.48,1414.17 U5.11
NetR4_2: R4.2 U5.10 | length 1829.9
  Top Layer w11.81: v1(1633.86,413.39) 1654.53,413.39 1692.91,451.77 R4.2
  Layer 2 w11.81: v1(1633.86,413.39) 1633.86,390.78 1640.78,383.86 1774.58,383.86 1781.5,390.78 1781.5,475.36 1774.58,482.28 1542.35,482.28 1535.43,489.2 1535.43,718.5 1545.28,728.35 1574.8,728.35 1653.54,807.09 1653.54,849.38 1666.37,862.2 1728.35,862.2 1742.13,875.98 1938.98,875.98 2007.87,944.88 2007.87,1302.14 1996.06,1313.95 1949.04,1313.95 U5.10
NetR5_2: R5.2 U5.9 | length 1609.3
  Top Layer w11.81: v1(1624.02,295.28) R5.2
  Layer 2 w11.81: v1(1624.02,295.28) 1486.22,295.28 1476.38,305.12 1476.38,895.67 1509.84,929.13 1952.76,929.13 1978.35,954.72 1978.35,1141.73 1948.82,1171.26 U5.9
NetR6_2: R6.2 U5.15 | length 2363.4
  Top Layer w11.81: R6.2 1850.39,413.39 1860.24,403.54 v1(1870.08,403.54)
  Layer 1 w11.81: v1(1870.08,403.54) 2116.14,403.54 2470.47,757.87 2470.47,915.35 2421.26,964.57 2421.26,1439.93 2414.34,1446.85 2142.75,1446.85 2135.83,1453.77 2135.83,1801.18 2122.83,1814.17 U5.15
NetR7_2: R7.2 U5.14 | length 3220.6
  Top Layer w11.81: v1(1801.18,275.59) 1812.01,275.59 1850.39,313.98 R7.2
  Layer 1 w11.81: v1(1801.18,275.59) 1860.24,216.54 2099.38,216.54 2106.3,223.45 2106.3,367.1 2113.22,374.02 2145.67,374.02 2500,728.35 2500,935.04 2480.29,954.75 2480.29,964.54 2480.32,1427.17 2440.94,1466.54 2172.27,1466.54 2165.35,1473.45 2165.35,1820.87 2145.67,1840.55 2024.64,1840.55 2017.72,1847.47 2017.72,1971.43 2010.8,1978.35 1889.76,1978.35 1879.92,1968.5 1879.92,1721.09 1886.84,1714.17 U5.14
NetU1_12: U1.12 U1.13 U4.2 | length 2330.9
  Layer 1 w11.81: U4.2 264.06,948.03 275.59,936.5 275.59,208.38 287.12,196.85 1012.09,196.85 1023.62,208.38 1023.62,766.82 1012.09,778.35 U1.13 U1.12
pads on no net: DS1.5 DS1.8 U1.6 U2.3 U2.4 U2.5 U2.6 U2.10 U2.11 U2.12 U2.13 U3.4 U3.5 U3.6 U3.8 U3.9 U3.10 U3.11 U3.12 U3.13 U4.3 U4.4 U4.5 U4.6 U4.8 U4.9 U4.10 U4.11 U4.12 U4.13

## Polygon pours and split planes (outlines as drawn)
GND on Bottom Layer "GND_L04_P000" (solid, pour order 0): 2202.25,50 cw(c2421.94,208.96) 2559.06,442.91 2559.06,2175.2 2548.97,2185.28 ccw(c2478.29,2114.62) 2478.26,2214.57 37.68,2214.57 ccw(c37.66,2147.41) -9.84,2194.88 cw(c-33.55,2171.14) 0,2171.12 0,50

## Silkscreen, mask and mechanical layers (free items; w line width, h text height)
Top Overlay:
  text "GND" at 402.93,1841.93 h30
  text "VCC" at 411.54,1740.28 h30
  text "J" at 224.54,1632.02 h30
  text "M2" at 206.69,1525.59 h30
  text "M1" at 216.54,1427.17 h30
  text "C" at 224.54,1336.74 h30
  text "Voting Machine PCB" at 906.62,49.21 h40
Mechanical 1:
  lines w7.87: 314.96,0 2027.56,0 ccw(c2027.56,570.87) 2598.43,570.87 2598.43,2194.09 ccw(c2548.43,2194.09) 2548.43,2244.09 10.63,2244.09 ccw(c10.63,2194.09) -39.37,2194.09 -39.37,50 ccw(c10.63,50) 10.63,0 472.44,0